# Altium PCB TEMPLATE_PCB_4L.PcbDoc
Units mm, origin at the board's own origin, x right, y up, seen from the top; angles counter-clockwise.
Board outline 50 x 50 mm, 4 copper layers (Top, GND, PWR, Bottom), stack 1.591 mm thick; 2 components, 0 nets, 0 pads, 0 vias.
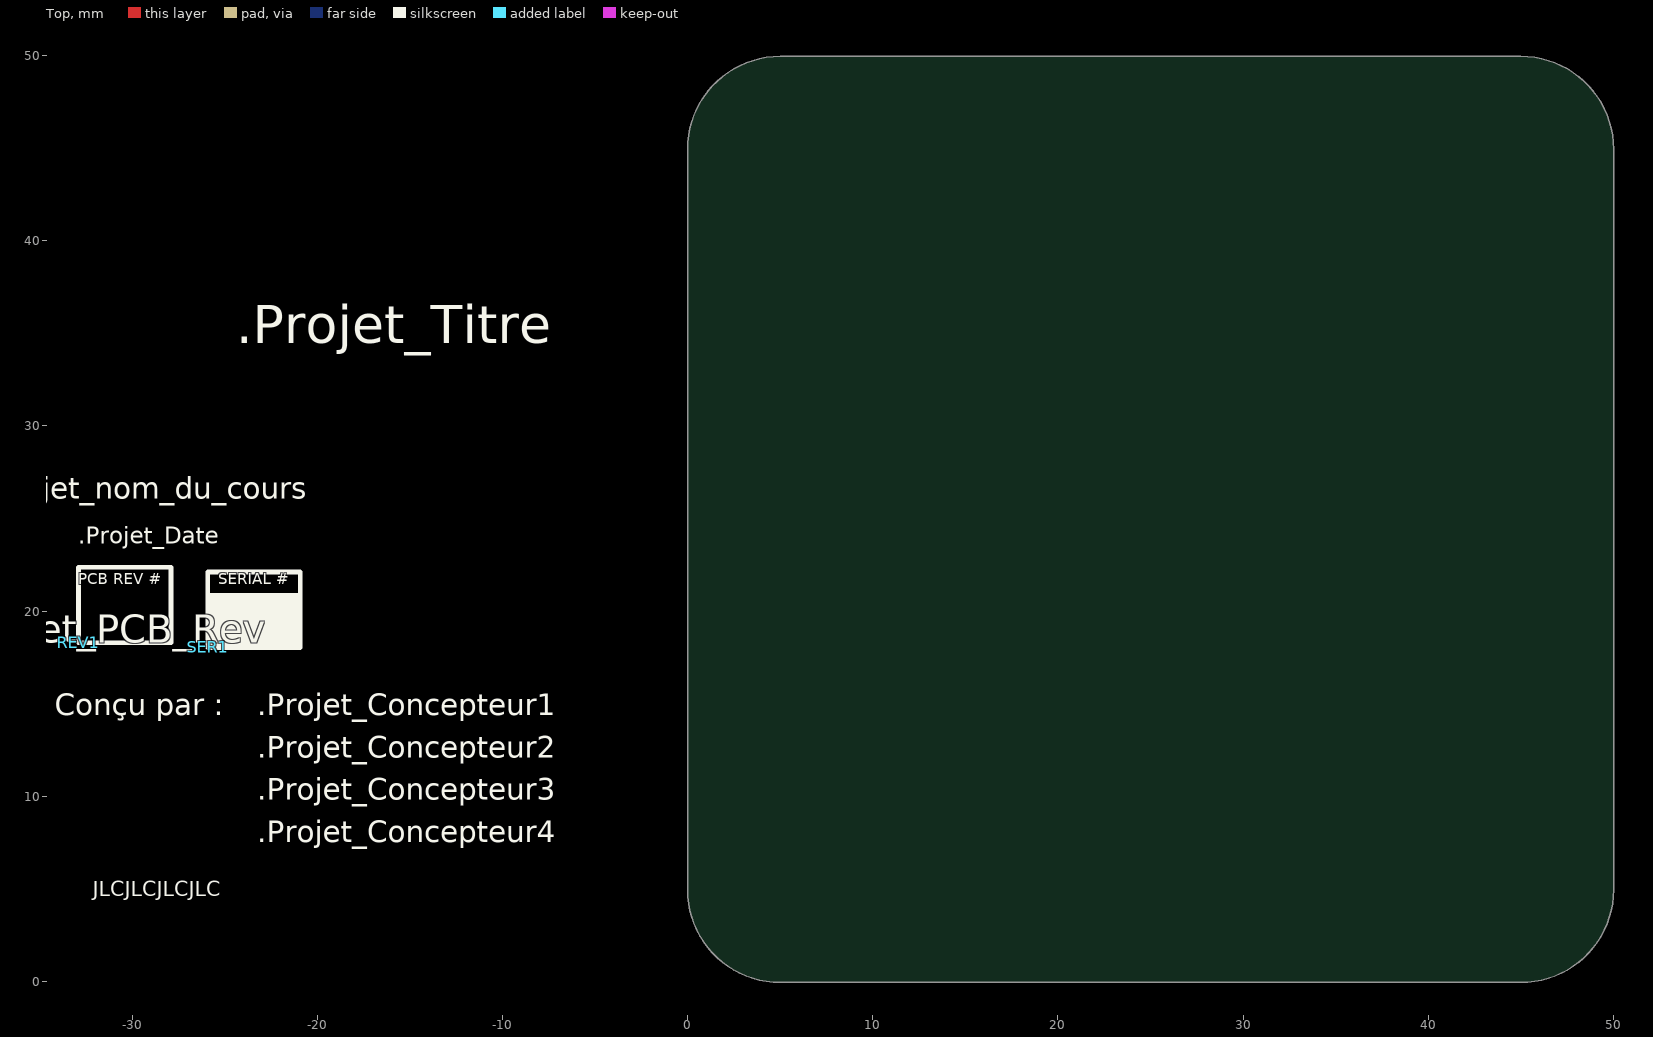
[diagram p0: Top view]
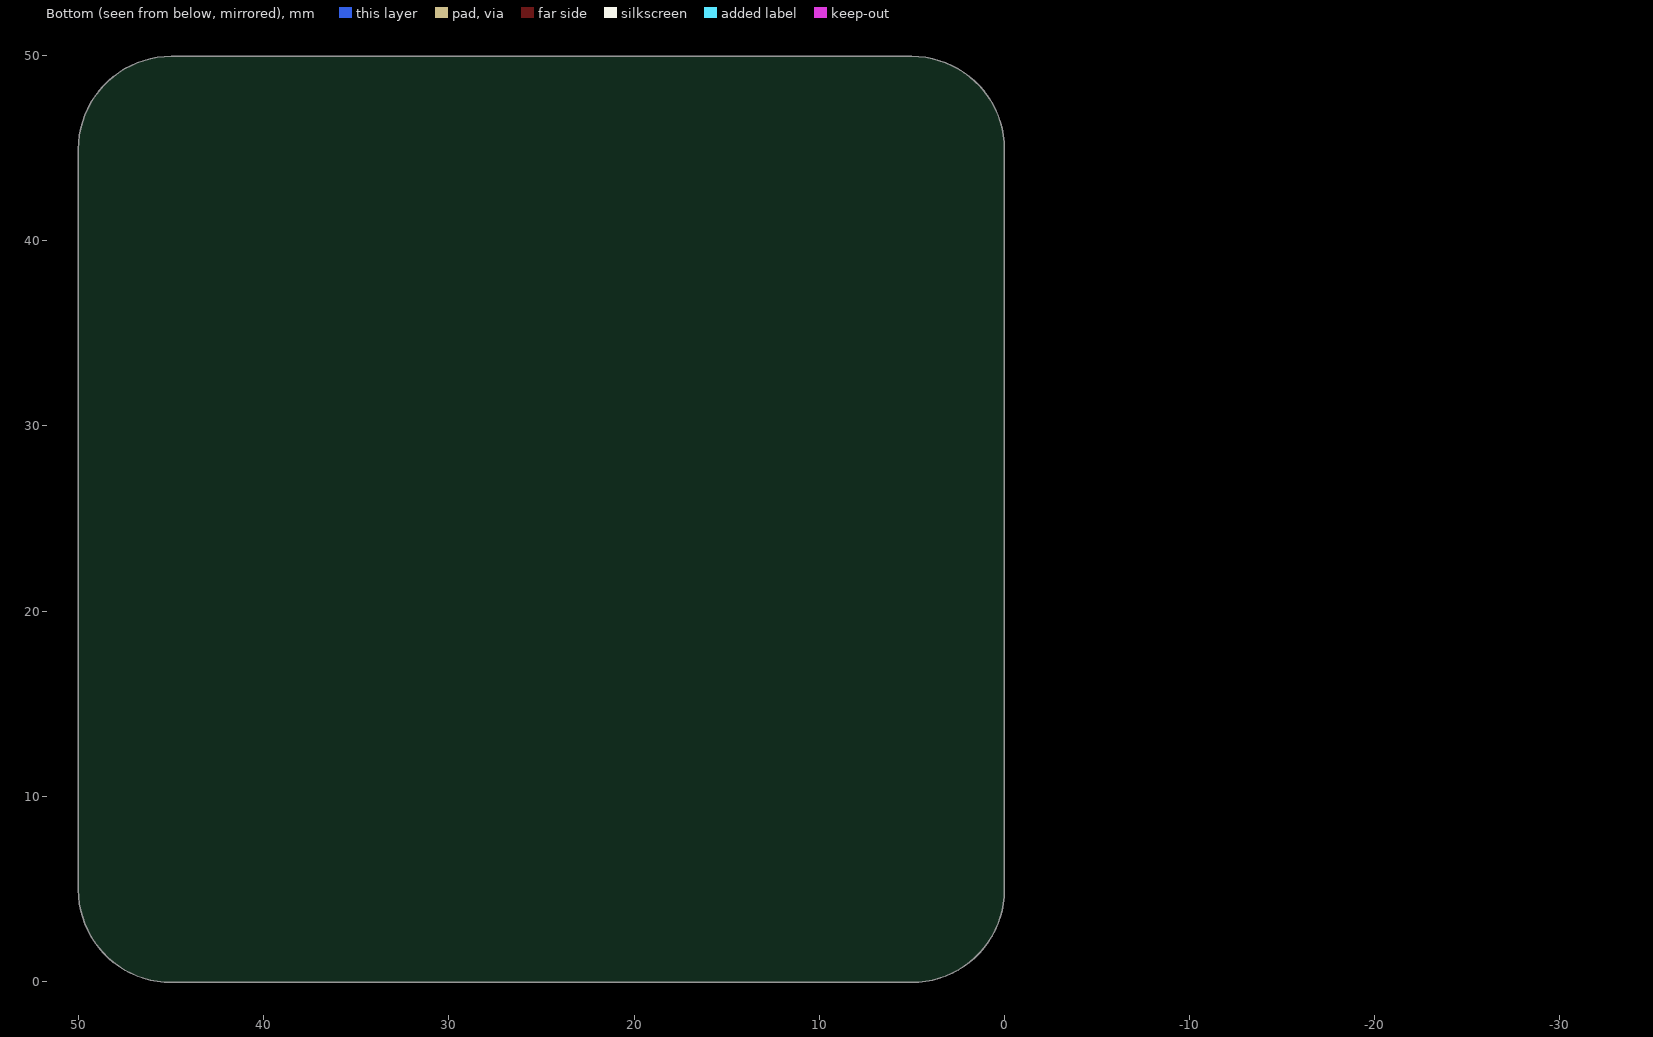
[diagram p1: Bottom view, seen from below]
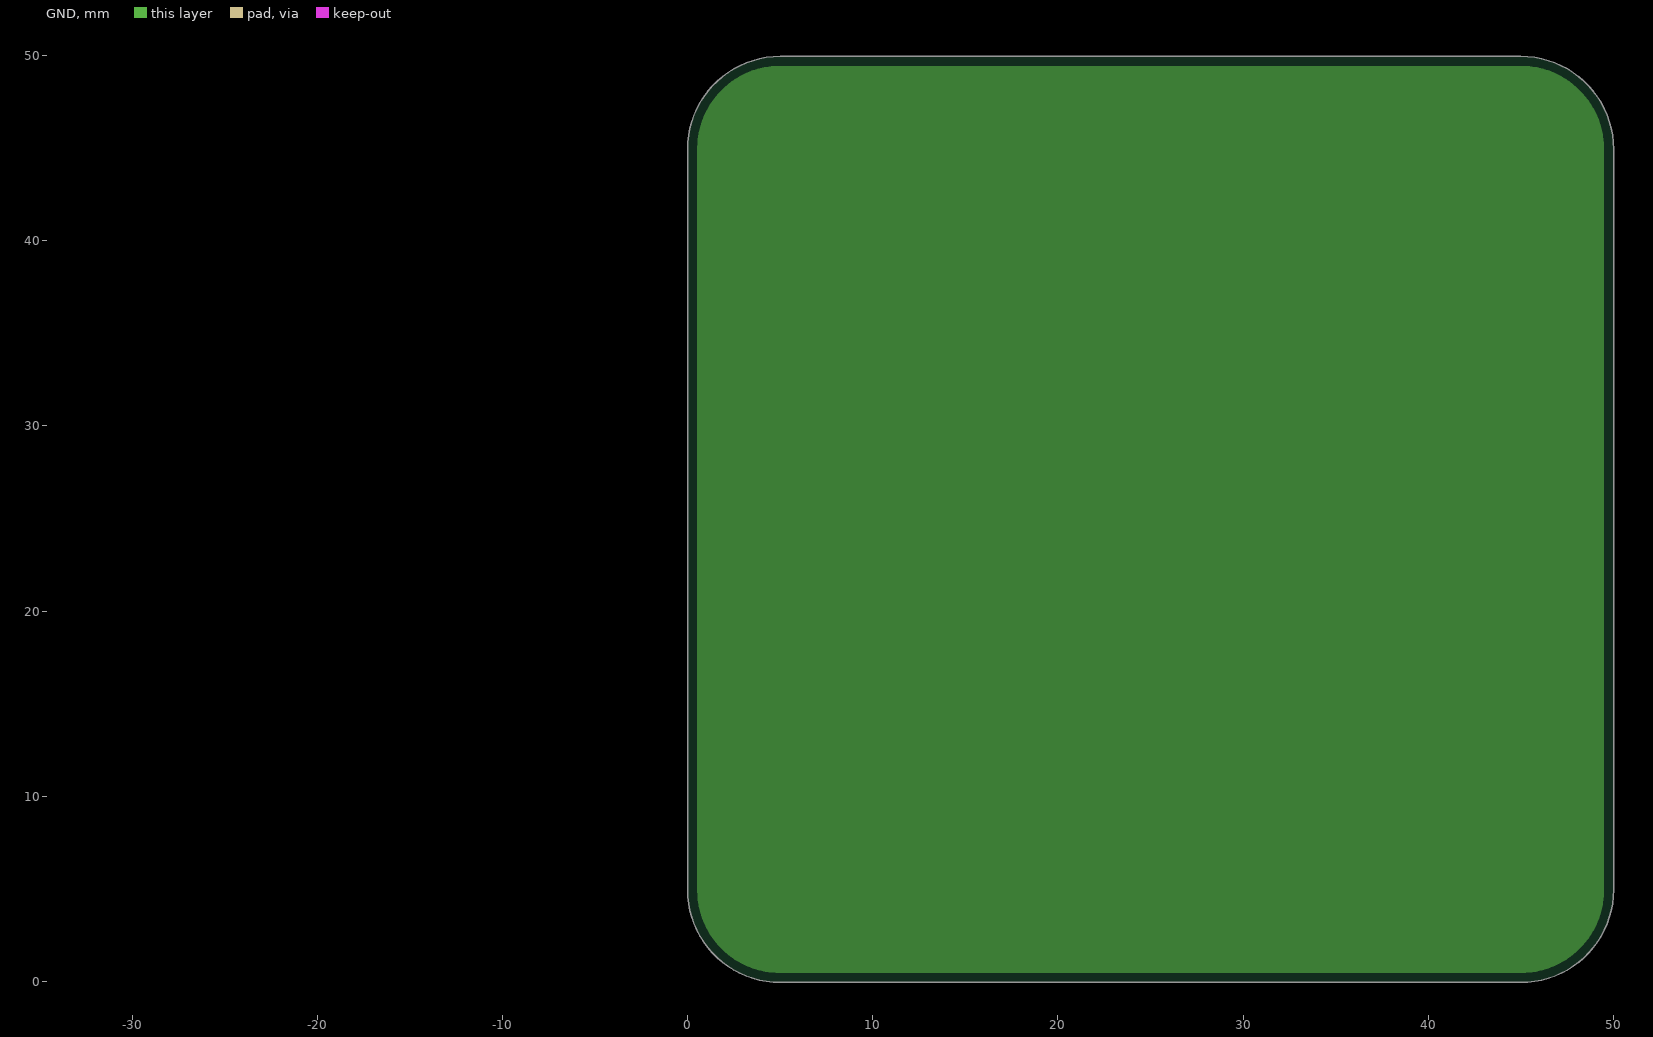
[diagram p2: GND, clearances drawn from the general rule]
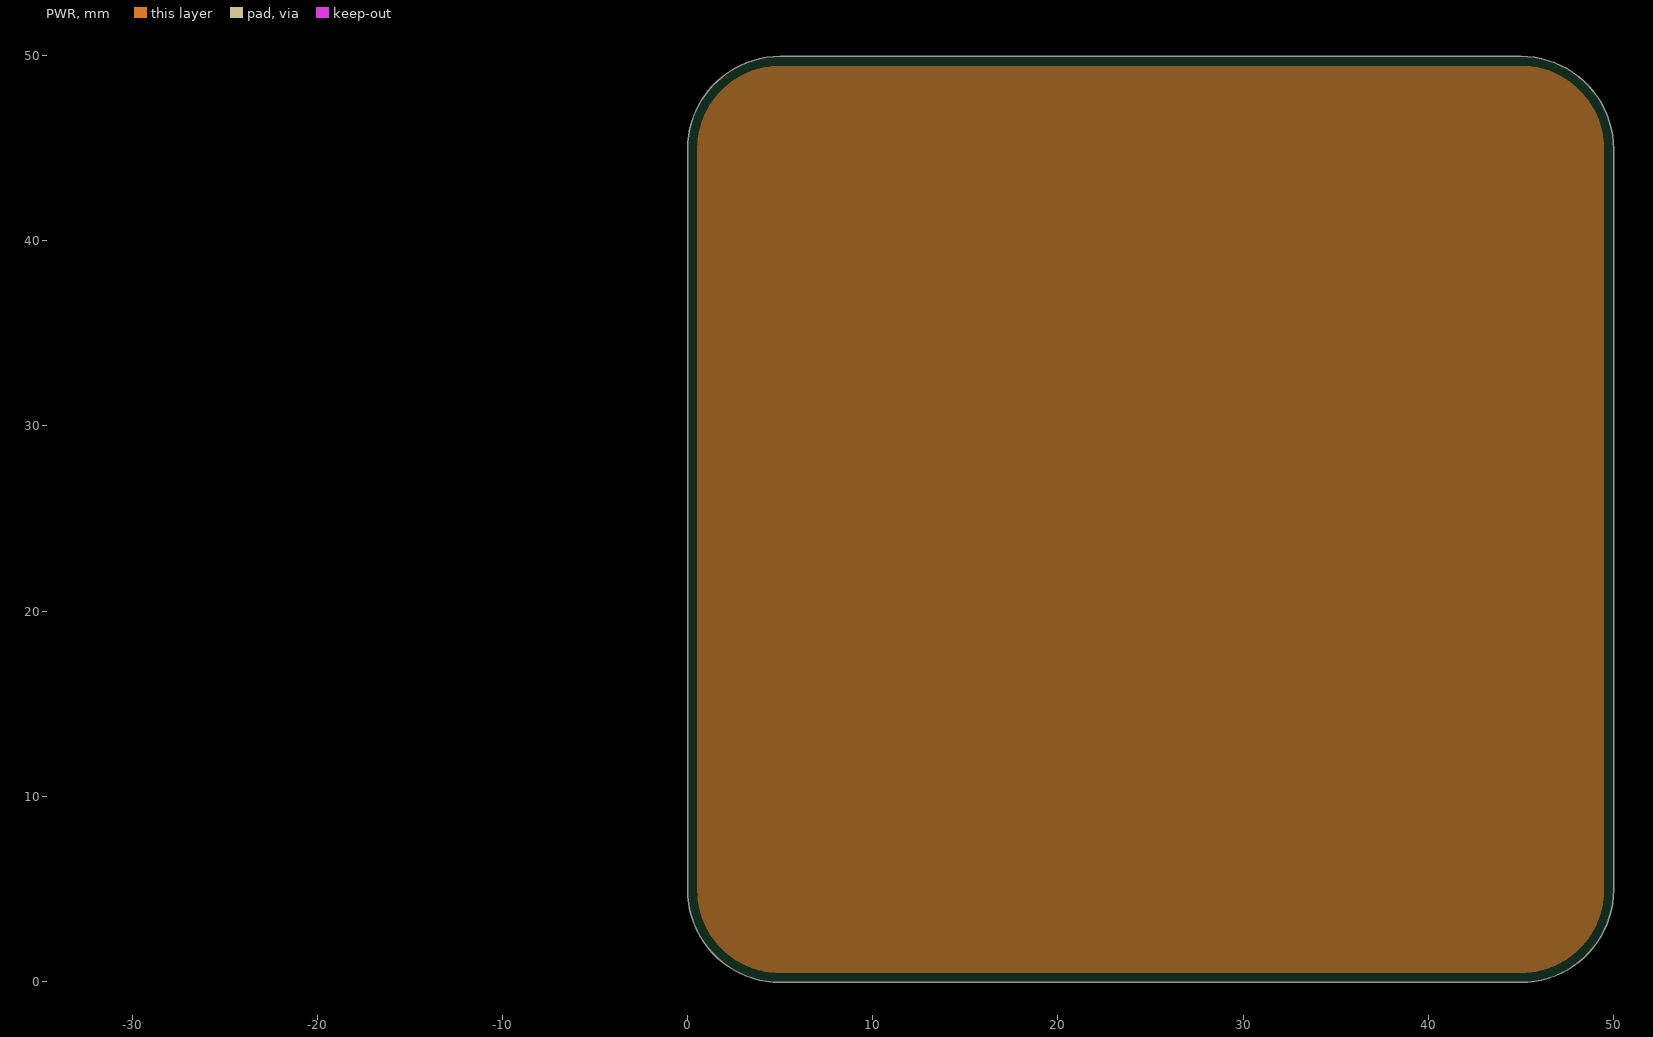
[diagram p3: PWR, clearances drawn from the general rule]

## Layer stack, top to bottom
Top Solder: solder mask 0.0102, Solder Resist, Dk 3.5
Top: signal copper 0.035
Dielectric 1: prepreg 0.2104, 7628, Dk 4.1
GND: plane copper 0.0175
Dielectric 2: core 1.065, Dk 4.6
PWR: plane copper 0.0175
Dielectric 3: prepreg 0.2104, 7628, Dk 4.6
Bottom: signal copper 0.035
Bottom Solder: solder mask 0.0102, Solder Resist, Dk 3.5

## Board outline
0,4.949 0,44.949 cw(c5,44.949) 5,49.949 45,49.949 cw(c45,44.949) 50,44.949 50,4.949 cw(c45,4.949) 45,-0.051 5,-0.051 cw(c5,4.949)

## Design rules (kind name [scope] priority, off if disabled: settings)
BoardOutlineClearance [All] p1: gap=0.2 ignorepadtopadclearanceinfootprint=FALSE except(0: Arc-SplitContinuation Track-SplitContinuation SMDPad-SplitContinuation THPad-SplitContinuation Via-SplitContinuation Fill-SplitContinuation Poly-SplitContinuation Region-SplitContinuation Text-SplitContinuation)
Clearance [All] p1: gap=0.152 ignorepadtopadclearanceinfootprint=FALSE except(0: Arc-Hole Track-Hole SMDPad-Hole THPad-Hole Via-Hole Fill-Hole Poly-Hole Region-Hole Text-Hole; 0.127: Arc-Arc Arc-Track Track-Track SMDPad-Fill SMDPad-Poly SMDPad-Region; 0.2: Arc-SMDPad Track-SMDPad; 0.254: Arc-Via Track-Via Via-Via; 0.33: Arc-THPad Track-THPad; 0.5: THPad-THPad)
ComponentClearance "Schematic Component Clearance Constraint_1" [InComponent('SER1')] p1: gap=0 collisioncheckmode=3 verticalgap=0 showdistances=FALSE
ComponentClearance "Schematic Component Clearance Constraint" [InComponent('REV1')] p2: gap=0 collisioncheckmode=3 verticalgap=0 showdistances=FALSE
ComponentClearance [All] p3: gap=0.102 collisioncheckmode=3 verticalgap=0.102 showdistances=FALSE
HoleSize [All] p1: absolutevalues=TRUE maxlimit=6.3 minlimit=0.3 maxpercent=80.000 minpercent=20.000
HoleToHoleClearance [All] p1: gap=0.5 allowstackedmicrovias=FALSE
MinimumAnnularRing [All] p1: minimumring=0.1
MinimumSolderMaskSliver [All] p1: minsoldermaskwidth=0.1
PlaneClearance [All] p1: clearance=0.152
PlaneConnect [All] p1: pad.planeconnectstyle=Relief pad.reliefexpansion=0.508 pad.reliefentries=4 pad.reliefconductorwidth=0.254 pad.reliefairgap=0.254 via.planeconnectstyle=Direct via.reliefexpansion=0.508 via.reliefentries=4 via.reliefconductorwidth=0.254 via.reliefairgap=0.254
PolygonConnect [All] p1: thpad.connectstyle=Relief thpad.reliefconductorwidth=0.254 thpad.reliefentries=4 thpad.polygonreliefangle="90 Angle" thpad.airgapwidth=0.254 smdpad.connectstyle=Relief smdpad.reliefconductorwidth=0.254 smdpad.reliefentries=4 smdpad.polygonreliefangle="90 Angle" smdpad.airgapwidth=0.254 via.connectstyle=Direct via.reliefconductorwidth=0.254 via.reliefentries=4 via.polygonreliefangle="90 Angle" via.airgapwidth=0.254
RoutingVias [All] p1: holewidth=0.3 width=0.5 viastyle="Through Hole" minholewidth=0.3 minwidth=0.5 maxholewidth=6.3 maxwidth=6.5
SilkToSilkClearance [All] p1: silktosilkclearance=0.102
SilkToSolderMaskClearance [IsPad] p1: minsilkscreentomaskgap=0.024 clearancetoexposedcopper=FALSE
SolderMaskExpansion SolderMaskExpansion_Via [isVia] p1: expansion=0.102 istentingtop=TRUE
SolderMaskExpansion [All] p2: expansion=0.051 istentingtop=FALSE
Width [All] p1: maxlimit=25.4 minlimit=0.127 preferedwidth=0.152 minimp=50.000000 maximp=50.000000 favimp=50.000000
22 further rules are at their usual default settings.

## Components (designator, comment, footprint, x,y, rotation, side; value= is the part's Value field where it differs from the comment)
REV1 "Revision Cartridge Mini" REV_REVISION_CARTRIDGE_MINI -32.893,18.288 r0 top
SER1 "Serial Cartridge MICRO" SER_SERIAL_CARTRIDGE_MICRO -25.908,18.034 r0 top

## Footprints (in the part's own frame and the unit in brackets; to place one, negate y for a bottom-side part, rotate by r counter-clockwise, add the part's x,y. Pads: shape width x height; smd on the part's side, far side on the other; paste and mask are expansions set on the pad)
REV_REVISION_CARTRIDGE_MINI [mm]
  silkscreen extent 0,0 5,4.08
SER_SERIAL_CARTRIDGE_MICRO [mm]
  silkscreen extent 0,0 5.02,4.08

## Part data
REV1: library part REV_REVISION_CARTRIDGE_MINI, "REV - REVISION CARTRIDGE MINI", Assembly Type=NONE, Rule="Component Clearance Constraint [Horizontal Clearance = 0mil    Vertical Clearance = 0mil]"
SER1: library part SER_SERIAL_CARTRIDGE_MICRO, "SER - SERIAL CARTRIDGE MICRO", Assembly Type=NONE, Rule="Component Clearance Constraint [Horizontal Clearance = 0mil    Vertical Clearance = 0mil]"

## Nets (pads, with @x,y where several pads share a name; then routed paths per layer and width w, separated by ;. In a path a pad name is that pad's centre, name@x,y a point inside that pad or via, vN(x,y) a via of type N, cw(c..) or ccw(c..) an arc to the next point about the centre after c; other vN are vias at no path point)

## Polygon pours and split planes (outlines as drawn)
no net on GND (split plane): 45.294,49.431 45.586,49.402 45.876,49.355 46.163,49.288 46.444,49.202 46.719,49.099 46.987,48.978 47.246,48.839 47.496,48.684 47.734,48.513 47.962,48.326 48.176,48.125 48.377,47.911 48.564,47.683 48.735,47.445 48.89,47.195 49.029,46.936 49.15,46.668 49.253,46.393 49.339,46.112 49.406,45.825 49.453,45.535 49.482,45.243 49.491,44.967 49.49,44.949 49.49,4.949 49.491,4.931 49.482,4.655 49.453,4.363 49.406,4.073 49.339,3.786 49.253,3.505 49.15,3.23 49.029,2.962 48.89,2.703 48.735,2.453 48.564,2.215 48.377,1.987 48.176,1.773 47.962,1.572 47.734,1.385 47.496,1.214 47.246,1.059 46.987,0.92 46.719,0.799 46.444,0.696 46.163,0.61 45.876,0.543 45.586,0.496 45.294,0.467 45.018,0.458 45,0.459 5,0.459 4.982,0.458 4.706,0.467 4.414,0.496 4.124,0.543 3.837,0.61 3.556,0.696 3.281,0.799 3.013,0.92 2.754,1.059 2.504,1.214 2.266,1.385 2.038,1.572 1.824,1.773 1.623,1.987 1.436,2.215 1.265,2.453 1.11,2.703 0.971,2.962 0.85,3.23 0.747,3.505 0.661,3.786 0.594,4.073 0.547,4.363 0.518,4.655 0.509,4.931 0.51,4.949 0.51,44.949 0.509,44.967 0.518,45.243 0.547,45.535 0.594,45.825 0.661,46.112 0.747,46.393 0.85,46.668 0.971,46.936 1.11,47.195 1.265,47.445 1.436,47.683 1.623,47.911 1.824,48.125 2.038,48.326 2.266,48.513 2.504,48.684 2.754,48.839 3.013,48.978 3.281,49.099 3.556,49.202 3.837,49.288 4.124,49.355 4.414,49.402 4.706,49.431 4.982,49.44 5,49.439 45,49.439 45.018,49.44
no net on PWR (split plane): 45.294,49.431 45.586,49.402 45.876,49.355 46.163,49.288 46.444,49.202 46.719,49.099 46.987,48.978 47.246,48.839 47.496,48.684 47.734,48.513 47.962,48.326 48.176,48.125 48.377,47.911 48.564,47.683 48.735,47.445 48.89,47.195 49.029,46.936 49.15,46.668 49.253,46.393 49.339,46.112 49.406,45.825 49.453,45.535 49.482,45.243 49.491,44.967 49.49,44.949 49.49,4.949 49.491,4.931 49.482,4.655 49.453,4.363 49.406,4.073 49.339,3.786 49.253,3.505 49.15,3.23 49.029,2.962 48.89,2.703 48.735,2.453 48.564,2.215 48.377,1.987 48.176,1.773 47.962,1.572 47.734,1.385 47.496,1.214 47.246,1.059 46.987,0.92 46.719,0.799 46.444,0.696 46.163,0.61 45.876,0.543 45.586,0.496 45.294,0.467 45.018,0.458 45,0.459 5,0.459 4.982,0.458 4.706,0.467 4.414,0.496 4.124,0.543 3.837,0.61 3.556,0.696 3.281,0.799 3.013,0.92 2.754,1.059 2.504,1.214 2.266,1.385 2.038,1.572 1.824,1.773 1.623,1.987 1.436,2.215 1.265,2.453 1.11,2.703 0.971,2.962 0.85,3.23 0.747,3.505 0.661,3.786 0.594,4.073 0.547,4.363 0.518,4.655 0.509,4.931 0.51,4.949 0.51,44.949 0.509,44.967 0.518,45.243 0.547,45.535 0.594,45.825 0.661,46.112 0.747,46.393 0.85,46.668 0.971,46.936 1.11,47.195 1.265,47.445 1.436,47.683 1.623,47.911 1.824,48.125 2.038,48.326 2.266,48.513 2.504,48.684 2.754,48.839 3.013,48.978 3.281,49.099 3.556,49.202 3.837,49.288 4.124,49.355 4.414,49.402 4.706,49.431 4.982,49.44 5,49.439 45,49.439 45.018,49.44

## Silkscreen, mask and mechanical layers (free items; w line width, h text height)
Top Overlay:
  text "0" at -39.82,38.103 h3.5
  text ".Projet_Titre" at -24.384,33.782 h3.5
  text ".Projet_nom_du_cours" at -37.973,25.654 h2
  text ".Projet_Date" at -32.893,23.622 h0.91
  text "Conçu par :" at -34.163,13.97 h2
  text ".Projet_Concepteur1" at -23.241,13.97 h2
  text ".Projet_Concepteur2" at -23.241,11.684 h2
  text ".Projet_Concepteur3" at -23.241,9.398 h2
  text ".Projet_Concepteur4" at -23.241,7.112 h2
  text "JLCJLCJLCJLC" at -32.108,4.595 h0.8
Board Outline:
  lines w0.254: 0,5 ccw(c5,5) 5,0 45,0 ccw(c45,5) 50,5 50,45 ccw(c45,45) 45,50 5,50 ccw(c5,45) 0,45 0,5

## Text inside footprints (layer, text, board x,y; h text height)
REV1: Top Overlay "PCB REV #" at -32.893,21.238 h1
SER1: Top Overlay "SERIAL #" at -25.345,21.226 h1